# Altium PCB ESP32S3 Core.PcbDoc
Units mil, origin at the board's own origin, x right, y up, seen from the top; angles counter-clockwise.
Board outline 2500 x 1100 mil, 2 copper layers (Top Layer, Bottom Layer), stack 26.6 mil thick; 43 components, 58 nets, 243 pads, 87 vias.
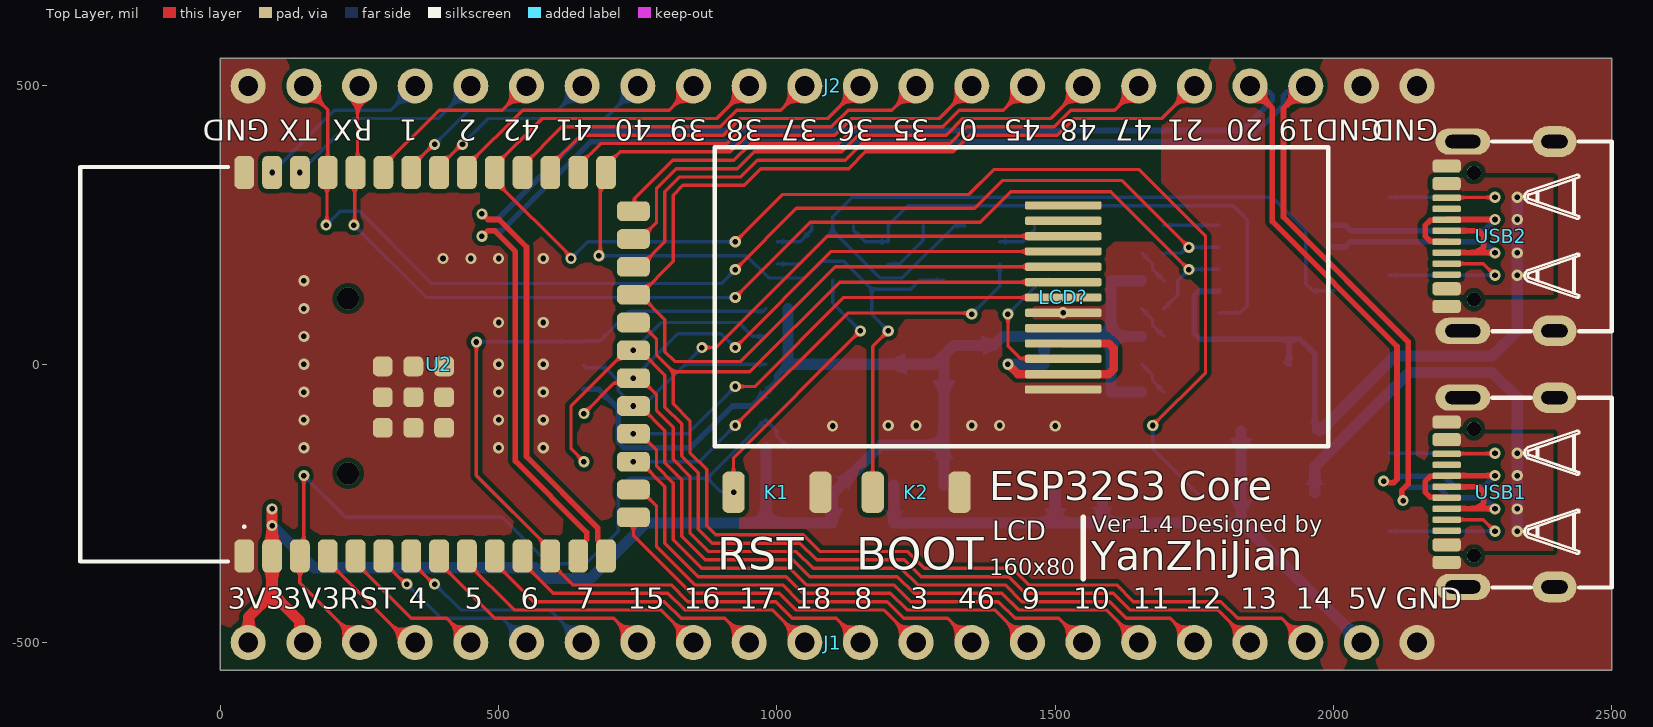
[diagram p0: Top Layer view]
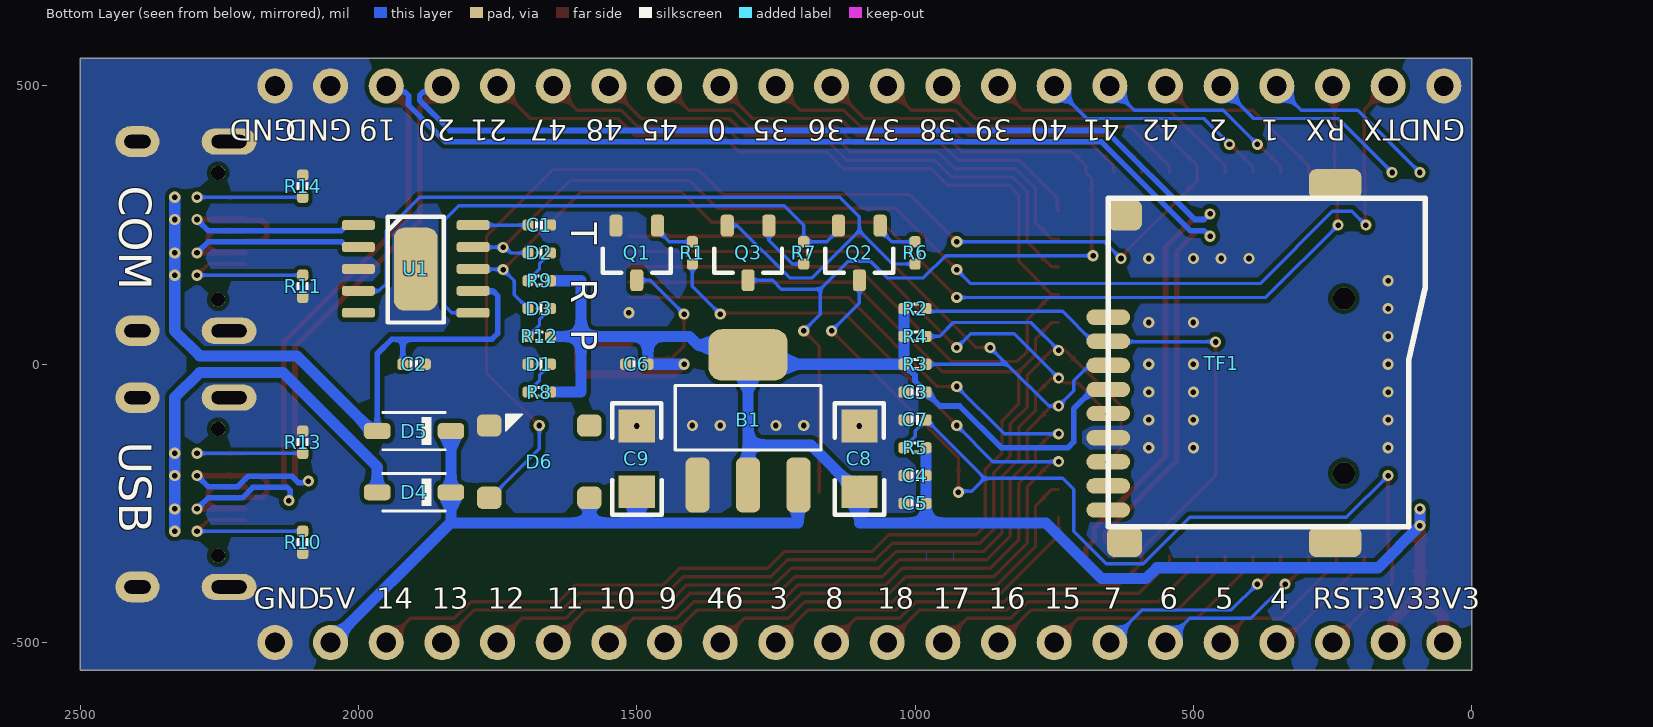
[diagram p1: Bottom Layer view, seen from below]
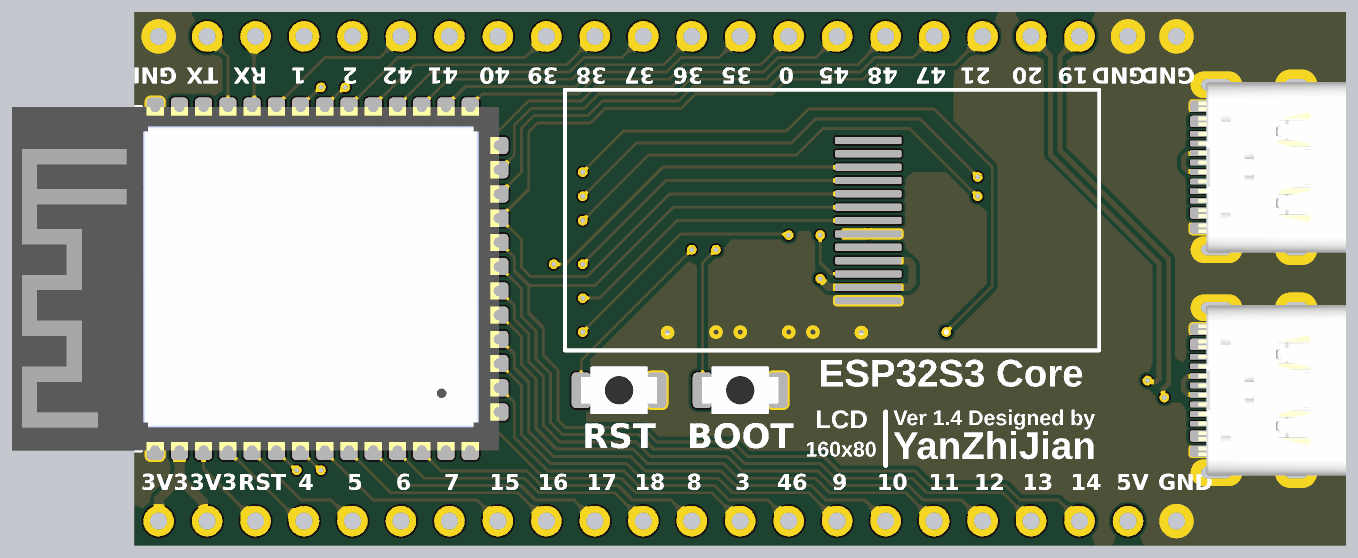
[diagram p2: 3D render of the assembled board from above, using the file's embedded part models]
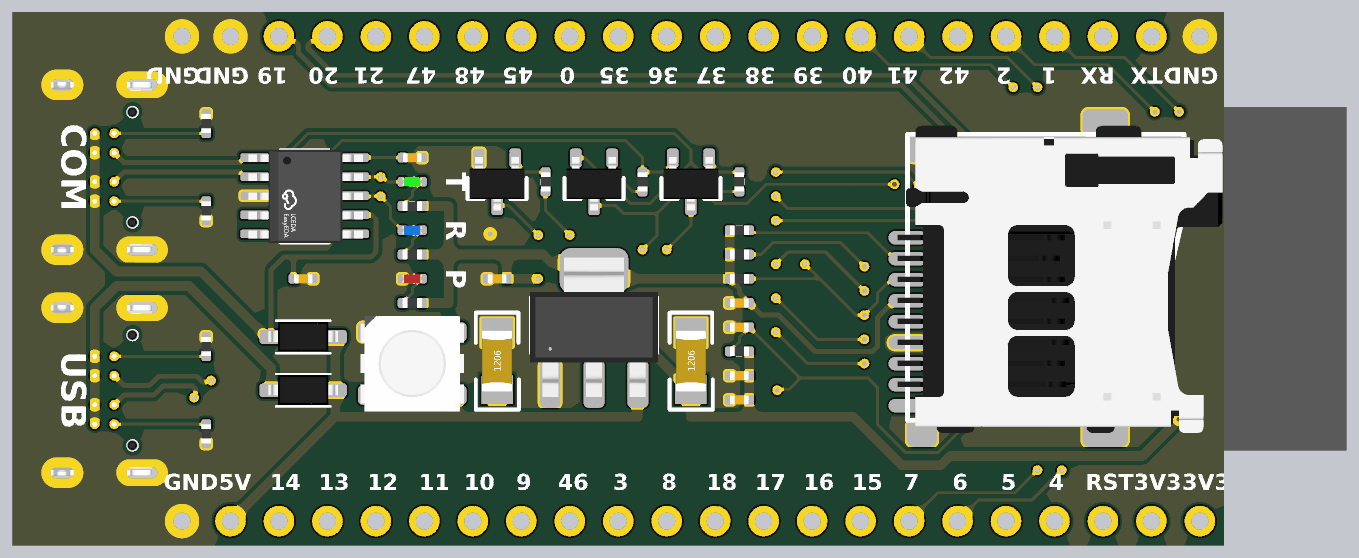
[diagram p3: 3D render of the assembled board from below, using the file's embedded part models]

## Layer stack, top to bottom
Top Solder: solder mask 0.4, Solder Resist, Dk 3.5
Top Layer: signal copper 1.4
Dielectric 4: prepreg 2.8, PP-006, Dk 4.1
Dielectric 2: prepreg 2.8, PP-006, Dk 4.1
Dielectric 1: dielectric 12.6, FR-4, Dk 4.8
Dielectric 3: prepreg 2.8, PP-006, Dk 4.1
Dielectric 5: prepreg 2.8, PP-006, Dk 4.1
Bottom Layer: signal copper 1.4
Bottom Solder: solder mask 0.4, Solder Resist, Dk 3.5

## Board outline
0,-550 0,550 2500,550 2500,-550

## Design rules (kind name [scope] priority, off if disabled: settings)
Clearance [All] p1: gap=8 ignorepadtopadclearanceinfootprint=TRUE
DiffPairsRouting [All] p1: maxlimit=10 minlimit=10 mostfreqgap=10 toplayer_minwidth=10 toplayer_maxwidth=10 toplayer_prefwidth=10 bottomlayer_minwidth=10 bottomlayer_maxwidth=10 bottomlayer_prefwidth=10 maxuncoupledlength=500
MatchedLengths [InDifferentialPairClass('90om')] p1: tolerance=1000 checknetsindiffpair=FALSE checkdiffpairvsdiffpair=TRUE checkxsignals=TRUE checkothers=TRUE
MatchedLengths DiffPair_90MatchedLengths [InDifferentialPairClass('90om')] p2: tolerance=5 checknetsindiffpair=TRUE checkdiffpairvsdiffpair=FALSE checkxsignals=FALSE checkothers=FALSE
MinimumSolderMaskSliver [All] p1: minsoldermaskwidth=0
PlaneConnect [All] p1: pad.planeconnectstyle=Relief pad.reliefexpansion=20 pad.reliefentries=4 pad.reliefconductorwidth=10 pad.reliefairgap=10 via.planeconnectstyle=Direct via.reliefexpansion=20 via.reliefentries=4 via.reliefconductorwidth=10 via.reliefairgap=10
PolygonConnect [All] p1: connectstyle=Direct reliefconductorwidth=10 reliefentries=4 polygonreliefangle="90 Angle" airgapwidth=10
RoutingVias [All] p1: holewidth=10 width=20 viastyle="Through Hole" minholewidth=10 minwidth=20 maxholewidth=50 maxwidth=50
SilkToSilkClearance [All] p1: silktosilkclearance=0
SilkToSolderMaskClearance [IsPad] p1: minsilkscreentomaskgap=0 clearancetoexposedcopper=TRUE
SolderMaskExpansion [All] p1: expansion=4 istentingtop=FALSE
SupplyNets "Schematic Supply Nets_4" [InNet('VBUS')] p1: voltage=0.000
SupplyNets "Schematic Supply Nets_3" [InNet('GND')] p2: voltage=0.000
SupplyNets "Schematic Supply Nets_2" [InNet('VCC_3V3')] p3: voltage=0.000
SupplyNets "Schematic Supply Nets" [InNet('VCC_5V')] p4: voltage=0.000
UnRoutedNet [All] p1: checkbadconnections=TRUE
Width [All] p1: maxlimit=20 minlimit=6 preferedwidth=6
24 further rules are at their usual default settings.

## Classes and differential pairs
differential pair COM: +D+ -D-
differential pair USB: +IO19 -IO20

## Components (designator, comment, footprint, x,y, rotation, side; value= is the part's Value field where it differs from the comment)
B1 "TLV1117-3.3" SOT-223 1300,-100 r270 bottom locked
C1 "0.1uF" CAP_0402 1675,250 r180 bottom locked value=0.1u
C2 "0.1uF" CAP_0402 1900,0 r180 bottom locked value=0.1u
C3 "0.1uF" CAP_0402 1000,-50 r180 bottom locked value=0.1u
C4 "10uF" CAP_0402 1000,-200 r180 bottom locked value=0.1u
C5 "0.1uF" CAP_0402 1000,-250 r180 bottom locked value=0.1u
C6 "0.1uF" CAP_0402 1500,0 r180 bottom locked value=0.1u
C7 "1uF" CAP_0402 1000,-100 r180 bottom locked value=0.1u
C8 "22uF" "C 1206" 1100,-170 r90 bottom locked value=0.1u
C9 "10uF" "C 1206" 1500,-170 r90 bottom locked value=0.1u
D1 "color?" LED_0402_RED 1675,0 r0 bottom locked
D2 "color?" LED_0402_GREEN 1675,200 r0 bottom locked
D3 "color?" LED_0402_BLUE 1675,100 r0 bottom locked
D4 "1N5819HW-7-F" SOD-123 1900,-230 r0 bottom locked
D5 "1N5819HW-7-F" SOD-123 1900,-120 r0 bottom locked
D6 "=value" LED_5050_WS2812B 1675,-175 r0 bottom locked
J1 "排针22p" 排针22P 50,-500 r0 top locked
J2 "排针22p" 排针22P 50,500 r0 top locked
K1 "TACT 2P" ButtonTACT_3x4x2_180 1000,-230 r180 top locked value=3x4
K2 "TACT 2P" ButtonTACT_3x4x2_180 1250,-230 r180 top locked value=3x4
LCD? "LCD" "LCD-80x160 0.96 13P" 1400,120 r0 top locked
Q1 "Value" SOT23_3 1500,200 r270 bottom locked
Q2 "Value" SOT23_3 1100,200 r270 bottom locked
Q3 "Value" SOT23_3 1300,200 r270 bottom locked
R1 "10K" RES_0402 1400,200 r90 bottom locked value=22R
R2 "10K" RES_0402 1000,100 r180 bottom locked value=22R
R3 "10K" RES_0402 1000,0 r180 bottom locked value=22R
R4 "10K" RES_0402 1000,50 r180 bottom locked value=22R
R5 "10K" RES_0402 1000,-150 r180 bottom locked value=22R
R6 "10K" RES_0402 1000,200 r90 bottom locked value=22R
R7 "10K" RES_0402 1200,200 r270 bottom locked value=22R
R8 "1K" RES_0402 1675,-50 r0 bottom locked value=22R
R9 "1K" RES_0402 1675,150 r0 bottom locked value=22R
R10 "5.1K" RES_0402 2100,-320 r270 bottom locked value=22R
R11 "5.1K" RES_0402 2100,140 r270 bottom locked value=22R
R12 "1K" RES_0402 1675,50 r0 bottom locked value=22R
R13 "5.1K" RES_0402 2100,-140 r270 bottom locked value=22R
R14 "5.1K" RES_0402 2100,320 r270 bottom locked value=22R
TF1 "TF" TF-SOCKET 325,265 r180 bottom locked
U1 "CH340K" ESSOP10 2000,250 r270 bottom locked
U2 "ESP32-S3-WROOM-1" ESP32S3WROOM1N16R8 250,0 r90 top locked
USB1 "Type-C" "USB TYPE-C 16P" 2300,-230 r90 top locked
USB2 "Type-C" "USB TYPE-C 16P" 2300,230 r90 top locked

## Footprints (in the part's own frame and the unit in brackets; to place one, negate y for a bottom-side part, rotate by r counter-clockwise, add the part's x,y. Pads: shape width x height; smd on the part's side, far side on the other; paste and mask are expansions set on the pad)
ButtonTACT_3x4x2_180 [mil]
  rrect50% 40x74 smd: 1(-78,0) 2(78,0)
  body extent -79,-49 79,49, height 63
"C 1206" [mm]
  rect 1.5x1.65 smd: 1(-1.5,0) 2(1.5,0)
  silkscreen extent -2.54,-1.14 2.54,1.12, body extent -1.6,-0.8 1.6,0.8, height 1.1
CAP_0402 [mil]
  rrect50% 20x20 smd: 1(-20,0) 2(20,0)
  silkscreen extent -7,-9 7,9, body extent -20,-10 20,10, height 20
ESP32S3WROOM1N16R8 [mm]
  rrect50% 1.5x0.9 smd: 1(-8.75,5.26) 2(-8.75,3.99) 3(-8.75,2.72) 4(-8.75,1.45) 5(-8.75,0.18) 6(-8.75,-1.09) 7(-8.75,-2.36) 8(-8.75,-3.63) 9(-8.75,-4.9) 10(-8.75,-6.17) 11(-8.75,-7.44) 12(-8.75,-8.71) 13(-8.75,-9.98) 14(-8.75,-11.25) 27(8.75,-11.25) 28(8.75,-9.98) 29(8.75,-8.71) 30(8.75,-7.44) 31(8.75,-6.17) 32(8.75,-4.9) 33(8.75,-3.63) 34(8.75,-2.36) 35(8.75,-1.09) 36(8.75,0.18) 37(8.75,1.45) 38(8.75,2.72) 39(8.75,3.99) 40(8.75,5.26)
  rrect50% 0.9x1.5 smd: 15(-6.985,-12.5) 16(-5.715,-12.5) 17(-4.445,-12.5) 18(-3.175,-12.5) 19(-1.905,-12.5) 20(-0.635,-12.5) 21(0.635,-12.5) 22(1.905,-12.5) 23(3.175,-12.5) 24(4.445,-12.5) 25(5.715,-12.5) 26(6.985,-12.5)
  rrect50% 0.9x0.9 smd: 41(-2.9,-2.46) 41(-2.9,-1.06) 41(-2.9,-3.86) 41(-1.5,-1.06) 41(-1.5,-3.86) 41(-1.5,-2.46) 41(-0.1,-1.06) 41(-0.1,-2.46) 41(-0.1,-3.86)
  silkscreen extent -9,5.21 9,12.75, body extent -9,-12.75 9,12.75, height 3.25
ESSOP10 [mm]
  rrect50% 3.8x2 smd: 0(2.007,2.616)
  rrect50% 0.45x1.5 smd: 1(0,0) 2(1,0) 3(2,0) 4(3,0) 5(4,0) 6(4,5.232) 7(3,5.232) 8(2,5.232) 9(1,5.232) 10(0,5.232)
  silkscreen extent -0.38,1.35 4.45,3.89, body extent -0.42,-0.33 4.48,5.67, height 1.66
"LCD-80x160 0.96 13P" [mm]
  rrect50% 3.5x0.38 smd: 1(2.9,4.2) 2(2.9,3.5) 3(2.9,2.8) 4(2.9,2.1) 5(2.9,1.4) 6(2.9,0.7) 7(2.9,0) 8(2.9,-0.7) 9(2.9,-1.4) 10(2.9,-2.1) 11(2.9,-2.8) 12(2.9,-3.5) 13(2.9,-4.2)
  silkscreen extent -13,-6.8 15,6.86, body extent -12.9,-6.71 14.99,6.81, height 1.5
LED_0402_BLUE [mil]
  rrect50% 20x20 smd: 1(-20,0) 2(20,0)
  silkscreen extent -6,-10 6,10, body extent -20,-10 20,10, height 18
LED_0402_GREEN [mil]
  rrect50% 20x20 smd: 1(-20,0) 2(20,0)
  silkscreen extent -6,-10 6,10, body extent -20,-10 20,10, height 18
LED_0402_RED [mil]
  rrect50% 20x20 smd: 1(-20,0) 2(20,0)
  silkscreen extent -6,-10 6,10, body extent -20,-10 20,10, height 18
LED_5050_WS2812B [mil]
  rrect50% 44x40 smd: 1(-90,65) 2(-90,-65) 3(90,-65) 4(90,65)
  silkscreen extent 30,-85 60,-55, body extent -106,-98 106,98, height 69
RES_0402 [mil]
  rrect50% 20x20 smd: 1(-20,0) 2(20,0)
  silkscreen extent -7,-10 7,10, body extent -20,-10 20,10, height 14
SOD-123 [mm]
  rrect50% 1.21x0.73 smd: A(1.68,0) C(-1.68,0)
  silkscreen extent -1.43,-0.85 1.43,0.85, body extent -1.83,-0.79 1.83,0.76, height 1.1
SOT23_3 [mm] "SOT23, 3-Leads, Body 3.1x3.0mm (max), Pitch 0.95mm, IPC Medium Density"
  rrect50% 1x0.6 smd: 1(-1.246,0.95) 2(-1.246,-0.95) 3(1.246,0)
  silkscreen extent -0.2,-1.55 0.9,1.55, body extent -1.3,-1.45 1.5,1.45, height 1.2
SOT-223 [mm]
  rrect50% 2.5x1.1 smd: 1(2.97,-2.3) 2(2.97,0) 3(2.97,2.3)
  rrect50% 2.34x3.6 smd: 4(-2.97,0)
  silkscreen extent -1.57,-3.33 1.37,3.33, body extent -3.64,-3.35 3.64,3.35, height 1.81
TF-SOCKET [mm]
  oval 2x0.7 smd: 1(-8.331,-4.582) 2(-8.331,-5.682) 3(-8.331,-6.782) 4(-8.331,-7.882) 5(-8.331,-8.982) 6(-8.331,-10.082) 7(-8.331,-11.182) 8(-8.331,-12.282) 9(-8.331,-13.382)
  rrect50% 1.6x1.4 smd: 10(-7.577,-14.836) 10(-7.577,0.068)
  rrect50% 2.4x1.4 smd: 10(2.023,-14.836) 10(2.023,1.476)
  silkscreen extent -8.33,-14.15 6.15,0.84, body extent -8.87,-14.81 8.18,1.29, height 2.05
"USB TYPE-C 16P" [mm]
  oval 1.2x2.5 hole 0.6 slot 1.6 at 90 deg: 1(-4.32,1.718) 3(4.32,1.717)
  oval 1.4x2 hole 0.6 slot 1.2 at 90 deg: 2(-4.32,-2.462) 4(4.32,-2.462)
  rrect50% 0.3x1.3 smd mask+0.064: A5(-1.25,2.462) A6(-0.25,2.462) A7(0.25,2.462) A8(1.25,2.462) B5(1.75,2.462) B6(0.75,2.462) B7(-0.75,2.462) B8(-1.75,2.462)
  rrect50% 0.6x1.3 smd mask+0.064: GND1(-3.2,2.462) GND2(3.2,2.462) VBUS1(-2.4,2.462) VBUS2(2.4,2.462)
  round 0.65 hole 0.65 unplated mask+0: ""(-2.89,1.218) ""(2.89,1.218)
  silkscreen extent -4.34,-5.07 4.32,0.37, body extent -4.48,-5.08 4.48,2.67, height 3.26
排针22P [mm]
  round 1.6 hole 0.9: 1(0,0) 2(2.54,0) 3(5.08,0) 4(7.62,0) 5(10.16,0) 6(12.7,0) 7(15.24,0) 8(17.78,0) 9(20.32,0) 10(22.86,0) 11(25.4,0) 12(27.94,0) 13(30.48,0) 14(33.02,0) 15(35.56,0) 16(38.1,0) 17(40.64,0) 18(43.18,0) 19(45.72,0) 20(48.26,0) 21(50.8,0) 22(53.34,0)

## Part data
B1: library part CJT1117-3.3, "LDO", Manufacturer_Name="Advanced Monolithic Systems", Manufacturer_Part_Number=AMS1117-3.3, Datasheet Link=http://www.advanced-monolithic.com/pdf/ds1117.pdf, Geometry.Height=1.8mm
C1 C2 C3 C4 C5 C6 C7: library part 电容-0402, "Capacitor"
C8 C9: library part 电容-1206, "Capacitor"
D1 D2 D3: library part LED_0402, "LED", Type=0402
D4 D5: "Diode Schottky 40 V 1A Surface Mount SOD-123", Package="SOD-123 Fairchild Semiconductor", Availability="In Stock", Check_prices=https://www.snapeda.com/parts/1N5819HW-7-F/Diodes+Inc./view-part/?ref=eda, MF="Diodes Inc.", MP=1N5819HW-7-F, Price=None, Purchase-URL=https://pricing.snapeda.com/search/part/1N5819HW-7-F/?ref=eda, SnapEDA_Link=https://www.snapeda.com/parts/1N5819HW-7-F/Diodes+Inc./view-part/?ref=snap
D6: library part LED_5050_WS2812B, "LED"
K1 K2: library part ButtonTACT_3x4x2_180, "Button", Type="TACT 2P"
LCD?: library part "LCD-80x160 0.96", "0.96 LCD 80*160", BOM名称="12864 点阵屏", Parameter=显示器件, 学习资源=www.openedv.com, 版权归属=正点原子
Q1 Q2 Q3: library part BJT_NPN, "Triode_NPN_SMD"
R1 R2 R3 R4 R5 R6 R7 R8 R9 R10 R11 R12 R13 R14: library part 电阻-0402, "Resistor"
TF1: library part TF卡座
U1: "USB to TTL Serial / UART for dual power"
USB1 USB2: library part "USB-Type-C 16P", "USB-Type-C_16P"

## Via types
v1: diameter 20, hole 10, Top Layer to Bottom Layer, 85 vias
v2: diameter 39.37, hole 39.37, Top Layer to Bottom Layer, 2 vias

## Nets (pads, with @x,y where several pads share a name; then routed paths per layer and width w, separated by ;. In a path a pad name is that pad's centre, name@x,y a point inside that pad or via, vN(x,y) a via of type N, cw(c..) or ccw(c..) an arc to the next point about the centre after c; other vN are vias at no path point)
D+: U1.1 USB2.A6 USB2.B6 | length 494.3
  Top Layer w10: USB2.A6 2202.27,220.94 2173.81,220.94 2164.46,230.28 2164.46,249.4 2173.81,258.75 2202.27,258.75 2203.52,260 v1(2290,260)
  Bottom Layer w10: U1.1 2020.67,250 2030.67,240 2270,240 v1(2290,260)
D-: U1.2 USB2.A7 USB2.B7 | length 494.1
  Top Layer w10: USB2.B7 2259.53,200.47 ; USB2.A7 2260.16,239.84 2269.84,230.16 2269.84,210.78 2259.53,200.47 ; v1(2290,200) 2289.53,200.47 2259.53,200.47
  Bottom Layer w10: U1.2 2020.67,210.63 2030.04,220 2270,220 v1(2290,200)
DTR: Q3.2 R6.1 U1.4 | length 1501.2
  Bottom Layer w6: R6.1 1040,180 1100,240 ; Q3.2 1319.06,249.06 1225,155 1185,155 1100,240 ; U1.4 1963.11,131.89 1950,145 1950,240 1890,300 1135,300 1100,265 1100,240
EN: C7.2 J1.3 K1.2 Q2.3 R5.1 U2.3 | length 2014.1
  Top Layer w6: v1(150,-200) 150,-337.4 U2.3 142.91,-392.91 J1.3 ; v1(922,-230) 922,-168 v1(1150,60)
  Bottom Layer w6: v1(150,-200) 225,-275 506.11,-275 589.76,-358.65 656.35,-358.65 715,-300 715,-225 735,-205 875,-205 ; v1(922,-230) 920,-228 898,-228 875,-205 ; R5.1 999.73,-129.73 999.73,-119.73 C7.2 875,-205 ; Q2.3 1100,110 v1(1150,60)
GND: B1.1 C1.2 C2.2 C3.1 C4.1 C5.1 C6.1 C7.1 C8.2 C9.2 D1.2 D6.3 J1.22 J2.1 J2.21 J2.22 K1.1 K2.1 LCD?.8 LCD?.13 Q1.2 R10.2 R11.2 R13.1 R14.1 TF1.6 TF1.10 U1.0 U1.3 U2.1 U2.40 U2.41 USB1.1 USB1.2 USB1.3 USB1.4 USB1.GND1 USB1.GND2 USB2.1 USB2.2 USB2.3 USB2.4 USB2.GND1 USB2.GND2
  other v1: 150,-150 500,-150 580,-150 1100,-110.94 1500,-110.94 1200,-110 1250,-110 1350,-110 1400,-110 150,-100 500,-100 580,-100 150,-50 500,-50 580,-50 150,0 500,0 580,0 150,50 500,75 580,75 1514.17,92.44 150,100 150,150 400,190 450,190 500,190 580,190
IO0: J2.14 K2.2 Q3.3 U2.27 | length 1948.6
  Top Layer w6: v1(680,195) 682.68,197.68 682.68,334.25 U2.27 692.91,356.3 718.12,381.5 916.36,381.5 946.36,411.5 1103.93,411.5 1133.93,441.5 1291.5,441.5 J2.14 ; K2.2 1172,32 v1(1200,60)
  Bottom Layer w6: v1(680,195) 945,195 985,155 1050,155 1080,185 1120,185 1170,135 ; v1(1200,60) 1170,90 1170,135 ; Q3.3 1255.94,150.94 1240,135 1170,135
IO1: J2.4 U2.39 | length 321.5
  Bottom Layer w6: v1(92.91,344.49) 204.93,456.5 306.5,456.5 J2.4
IO2: J2.5 U2.38 | length 371.5
  Bottom Layer w6: v1(142.91,344.49) 239.93,441.5 391.5,441.5 J2.5
IO3: J1.13 U2.15 | length 620
  Top Layer w6: U2.15 742.13,-307.27 846.36,-411.5 1003.93,-411.5 1033.93,-441.5 1191.5,-441.5 J1.13
IO4: J1.4 U2.4 | length 226.8
  Top Layer w6: U2.4 192.91,-353.51 339.4,-500 J1.4
IO5: J1.5 U2.5 | length 278.4
  Top Layer w6: U2.5 242.91,-356.3 343.12,-456.5 406.5,-456.5 J1.5
IO6: J1.6 U2.6 | length 327.4
  Top Layer w6: U2.6 292.91,-354.61 333.31,-395 v1(335,-395)
  Bottom Layer w6: v1(335,-395) 396.5,-456.5 506.5,-456.5 J1.6
IO7: J1.7 U2.7 | length 377.4
  Top Layer w6: U2.7 342.91,-354.61 383.31,-395 v1(385,-395)
  Bottom Layer w6: v1(385,-395) 431.5,-441.5 591.5,-441.5 J1.7
IO8: J1.12 R2.2 TF1.2 U2.12 | length 1612.8
  Top Layer w6: v1(460,40) 460,-199.88 592.91,-332.8 U2.12 592.91,-356.3 633.12,-396.5 810.14,-396.5 840.14,-426.5 997.72,-426.5 1027.72,-456.5 1106.5,-456.5 J1.12
  Bottom Layer w6: v1(460,40) 460.65,40.65 652.35,40.65 TF1.2 681.31,41.31 735,95 975,95 R2.2
IO9: J1.15 R1.1 U2.17 | length 1732.1
  Top Layer w6: v1(742.13,-175) 753.94,-175 798.65,-219.72 798.65,-321.37 858.78,-381.5 1016.36,-381.5 1046.36,-411.5 1203.93,-411.5 1233.93,-441.5 1391.5,-441.5 J1.15 ; v1(925,-110) 1127,92 1348,92 v1(1350,90)
  Bottom Layer w6: v1(742.13,-175) 860,-175 v1(925,-110) ; v1(1350,90) 1400,140 R1.1
IO10: J1.16 LCD?.7 U2.18 | length 1913.1
  Top Layer w6: v1(742.13,-125) 753.94,-125 783.65,-154.72 783.65,-183.5 813.65,-213.5 813.65,-315.16 865,-366.5 1022.57,-366.5 1052.57,-396.5 1210.14,-396.5 1240.14,-426.5 1397.72,-426.5 1427.72,-456.5 1506.5,-456.5 J1.16 ; v1(925,-40) 960,-40 1120,120 LCD?.7
  Bottom Layer w6: v1(742.13,-125) 840,-125 v1(925,-40)
IO11: J1.17 LCD?.3 R3.2 TF1.3 U2.19 | length 2350.5
  Top Layer w6: v1(742.13,-75) 753.94,-75 798.65,-119.72 798.65,-177.29 828.65,-207.29 828.65,-308.95 871.21,-351.5 1028.78,-351.5 1058.78,-381.5 1216.36,-381.5 1246.36,-411.5 1403.93,-411.5 1433.93,-441.5 1591.5,-441.5 J1.17 ; v1(865,30) 890,30 1090.24,230.24 LCD?.3
  Bottom Layer w6: TF1.3 657.13,-6.13 691.13,-6.13 715,-30 715,-47.87 v1(742.13,-75) 760,-75 835,0 ; v1(865,30) 835,0 ; R3.2 835,0
IO12: J1.18 LCD?.4 TF1.5 U2.20 | length 2317.3
  Top Layer w6: v1(653,-88.61) 707.98,-33.64 733.49,-33.64 v1(742.13,-25) 753.94,-25 783.65,-54.72 783.65,-83.5 813.65,-113.5 813.65,-171.08 843.65,-201.08 843.65,-302.73 877.42,-336.5 1035,-336.5 1065,-366.5 1222.57,-366.5 1252.57,-396.5 1410.14,-396.5 1440.14,-426.5 1597.72,-426.5 1627.72,-456.5 1706.5,-456.5 J1.18 ; v1(925,30) 1097.68,202.68 LCD?.4
  Bottom Layer w6: v1(742.13,-25) 822.13,55 900,55 v1(925,30)
IO13: J1.19 R4.2 TF1.7 U2.21 | length 1984.6
  Top Layer w6: v1(653,-175.23) 630,-152.23 630,-75 730,25 v1(742.13,25) 753.94,25 798.65,-19.72 798.65,-77.29 828.65,-107.29 828.65,-164.86 858.65,-194.86 858.65,-296.52 883.64,-321.5 1041.21,-321.5 1071.21,-351.5 1228.78,-351.5 1258.78,-381.5 1416.36,-381.5 1446.36,-411.5 1603.93,-411.5 1633.93,-441.5 1791.5,-441.5 J1.19
  Bottom Layer w6: v1(742.13,25) 792.13,75 931,75 956,50 R4.2
IO14: J1.20 LCD?.6 U2.22 | length 2357.1
  Top Layer w6: U2.22 753.94,75 783.65,45.28 783.65,16.5 813.65,-13.5 ; LCD?.6 1112.56,147.56 951.5,-13.5 813.65,-13.5 ; J1.20 1906.5,-456.5 1827.72,-456.5 1797.72,-426.5 1640.14,-426.5 1610.14,-396.5 1452.57,-396.5 1422.57,-366.5 1265,-366.5 1235,-336.5 1077.42,-336.5 1047.42,-306.5 889.85,-306.5 873.65,-290.31 873.65,-188.65 843.65,-158.65 843.65,-101.08 813.65,-71.08 813.65,-13.5
IO15: J1.8 U2.8 | length 428.4
  Top Layer w6: U2.8 392.91,-356.3 493.12,-456.5 706.5,-456.5 J1.8
IO16: J1.9 U2.9 | length 478.4
  Top Layer w6: U2.9 442.91,-356.3 528.12,-441.5 791.5,-441.5 J1.9
IO17: J1.10 U2.10 | length 528.4
  Top Layer w6: U2.10 492.91,-356.3 563.12,-426.5 797.72,-426.5 827.72,-456.5 906.5,-456.5 J1.10
IO18: J1.11 U2.11 | length 578.4
  Top Layer w6: U2.11 542.91,-356.3 598.12,-411.5 803.93,-411.5 833.93,-441.5 991.5,-441.5 J1.11
IO19: J2.20 U2.13 USB1.A7 USB1.B7 | length 3545.2
  Top Layer w10: v1(470,230) 470.86,230 480.86,240 492.53,240 530,202.53 530,-174.05 657.91,-301.96 657.91,-315.59 642.91,-330.59 U2.13 ; J2.20 1910,460 1910,264.39 2133.96,40.43 2133.96,-215.18 2122.25,-226.89 2122.25,-235.18 2123.09,-236.02 2123.09,-243.09 v1(2125,-245) ; USB1.B7 2259.53,-259.53 ; USB1.A7 2260.16,-220.16 2269.84,-229.84 2269.84,-249.22 2259.53,-259.53 ; v1(2290,-260) 2289.53,-259.53 2259.53,-259.53
  Bottom Layer w10: v1(470,230) 470.86,230 480.86,240 505.78,240 665.78,400 1844.04,400 1910,465.96 1910,482.53 1917.33,489.86 1939.86,489.86 J2.20 ; v1(2125,-245) 2123.09,-243.09 2123.09,-236.02 2122.25,-235.18 2122.25,-226.89 2128.11,-221.04 2189.57,-221.04 2208.54,-240 2270,-240 v1(2290,-260)
IO20: J2.19 U2.14 USB1.A6 USB1.B6 | length 3545.1
  Top Layer w10: v1(470,270) 470.86,270 480.86,260 500.81,260 550,210.81 550,-165.76 677.91,-293.68 677.91,-315.59 692.91,-330.59 U2.14 ; J2.19 1890,460 1890,256.11 2113.96,32.14 2113.96,-206.89 2108.11,-212.75 2099.82,-212.75 2098.98,-211.91 2091.91,-211.91 v1(2090,-210) ; USB1.A6 2202.27,-239.06 2173.81,-239.06 2164.46,-229.72 2164.46,-210.6 2173.81,-201.25 2202.27,-201.25 2203.52,-200 v1(2290,-200)
  Bottom Layer w10: v1(470,270) 470.86,270 480.86,260 497.5,260 657.5,420 1835.76,420 1890,474.24 1890,482.53 1882.67,489.86 1860.14,489.86 J2.19 ; v1(2090,-210) 2091.91,-211.91 2098.98,-211.91 2099.82,-212.75 2108.11,-212.75 2119.82,-201.04 2197.86,-201.04 2216.82,-220 2270,-220 v1(2290,-200)
IO21: J2.18 LCD?.5 U2.23 | length 2147.2
  Top Layer w6: U2.23 U2.23@753.94,125 ; LCD?.5 1105.12,175.12 935,5 816.36,5 798.65,22.71 798.65,80.28 U2.23@753.94,125 ; J2.18 1691.5,441.5 1533.93,441.5 1503.93,411.5 1346.36,411.5 1316.36,381.5 1158.78,381.5 1128.78,351.5 971.21,351.5 941.21,321.5 831.14,321.5 813.65,304.01 813.65,184.72 U2.23@753.94,125
IO35: J2.13 U2.28 | length 678.4
  Top Layer w6: U2.28 642.91,356.3 683.12,396.5 910.14,396.5 940.14,426.5 1097.72,426.5 1127.72,456.5 1206.5,456.5 J2.13
IO36: J2.12 U2.29 | length 628.4
  Top Layer w6: U2.29 592.91,356.3 648.12,411.5 903.93,411.5 933.93,441.5 1091.5,441.5 J2.12
IO37: J2.11 U2.30 | length 578.2
  Top Layer w6: U2.30 542.91,355.91 613.5,426.5 897.72,426.5 927.72,456.5 1006.5,456.5 J2.11
IO38: D6.4 J2.10 U2.31 | length 2543.5
  Top Layer w6: v1(630,190) 630,192.8 492.91,329.88 U2.31 492.91,356.3 578.12,441.5 891.5,441.5 J2.10 ; v1(925,220) 1010,305 1345,305 1390,350 1650,350 1770,230 1770,-15 v1(1675,-110)
  Bottom Layer w6: v1(630,190) 660,220 v1(925,220) ; v1(1675,-110) 1675,-152 1763,-240 D6.4
IO39: J2.9 U2.32 | length 478.4
  Top Layer w6: U2.32 442.91,356.3 543.12,456.5 806.5,456.5 J2.9
IO40: J2.8 U2.33 | length 427.4
  Top Layer w6: U2.33 392.91,354.61 433.31,395 v1(435,395)
  Bottom Layer w6: v1(435,395) 481.5,441.5 691.5,441.5 J2.8
IO41: J2.7 U2.34 | length 377.4
  Top Layer w6: U2.34 342.91,354.61 383.31,395 v1(385,395)
  Bottom Layer w6: v1(385,395) 446.5,456.5 606.5,456.5 J2.7
IO42: J2.6 U2.35 | length 328.4
  Top Layer w6: U2.35 292.91,356.3 393.12,456.5 506.5,456.5 J2.6
IO45: J2.15 U2.26 | length 813.4
  Top Layer w6: U2.26 744.2,277.08 744.2,298.2 812.5,366.5 922.57,366.5 952.57,396.5 1110.14,396.5 1140.14,426.5 1297.72,426.5 1327.72,456.5 1406.5,456.5 J2.15
IO46: J1.14 U2.16 | length 764.5
  Top Layer w6: U2.16 753.94,-225 783.65,-254.72 783.65,-327.59 852.57,-396.5 1010.14,-396.5 1040.14,-426.5 1197.72,-426.5 1227.72,-456.5 1306.5,-456.5 J1.14
IO47: J2.17 U2.24 | length 1095.5
  Top Layer w6: U2.24 753.94,175 798.65,219.72 798.65,310.23 824.93,336.5 935,336.5 965,366.5 1122.57,366.5 1152.57,396.5 1310.14,396.5 1340.14,426.5 1497.72,426.5 1527.72,456.5 1606.5,456.5 J2.17
IO48: J2.16 U2.25 | length 957.9
  Top Layer w6: U2.25 753.94,225 783.65,254.72 783.65,316.44 818.72,351.5 928.78,351.5 958.78,381.5 1116.36,381.5 1146.36,411.5 1303.93,411.5 1333.93,441.5 1491.5,441.5 J2.16
LCD_LEDK: LCD?.11 Q1.3 | length 276
  Top Layer w6: v1(1415,90) 1415,33 1437.79,10.21 1513.73,10.21 LCD?.11
  Bottom Layer w6: v1(1415,90) 1475.94,150.94 Q1.3
NetC1_1: C1.1 U1.10 | length 99
  Bottom Layer w6: C1.1 U1.10
NetD1_1: D1.1 R8.2 | length 66.6
  Bottom Layer w6: D1.1 1674.73,-19.73 1674.73,-29.73 R8.2
NetD2_1: D2.1 R9.2 | length 66.6
  Bottom Layer w6: D2.1 1674.73,180.27 1674.73,170.27 R9.2
NetD3_1: D3.1 R12.2 | length 66.6
  Bottom Layer w6: D3.1 1674.73,80.27 1674.73,70.27 R12.2
NetQ1_1: Q1.1 R1.2 | length 79.2
  Bottom Layer w6: R1.2 1441.42,220 1462.6,241.18 Q1.1
NetQ2_1: Q2.1 R6.2 | length 79.2
  Bottom Layer w6: R6.2 1041.42,220 1062.6,241.18 Q2.1
NetQ3_1: Q3.1 R7.2 | length 106.7
  Bottom Layer w6: R7.2 1220,180 1262.6,222.6 Q3.1
NetR10_1: R10.1 USB1.A5 | length 285.6
  Top Layer w6: USB1.A5 2269.21,-279.21 v1(2290,-300)
  Bottom Layer w6: R10.1 v1(2290,-300)
NetR11_1: R11.1 USB2.A5 | length 285.6
  Top Layer w6: USB2.A5 2269.21,180.79 v1(2290,160)
  Bottom Layer w6: R11.1 v1(2290,160)
NetR13_2: R13.2 USB1.B5 | length 277.4
  Top Layer w6: USB1.B5 2203.6,-160.55 2289.45,-160.55 v1(2290,-160)
  Bottom Layer w6: R13.2 v1(2290,-160)
NetR14_2: R14.2 USB2.B5 | length 277.4
  Top Layer w6: USB2.B5 2203.6,299.45 2289.45,299.45 v1(2290,300)
  Bottom Layer w6: R14.2 v1(2290,300)
RTS: Q2.2 R7.1 U1.6 | length 990.3
  Bottom Layer w6: Q2.2 1137.4,241.18 1158.58,220 R7.1 1200,250 1235,285 1820,285 1845,260 1845,105 1832.52,92.52 U1.6
RXD: D2.2 J2.2 U1.9 U2.37 | length 2112.9
  Top Layer w6: J2.2 192.91,457.09 U2.37 191.46,343.03 191.46,251.46 v1(190,250) ; v1(925,170) 1035,280 1355,280 1405,330 1620,330 v1(1740,210)
  Bottom Layer w6: v1(190,250) 215,275 250,275 380,145 900,145 v1(925,170) ; D2.2 1726.21,200 1736.21,210 v1(1740,210) 1740.31,210.31 1793.68,210.31 U1.9
RXD0: D3.2 J2.3 U1.8 U2.36 | length 2087.8
  Top Layer w6: v1(240,250) 241.46,251.46 241.46,343.03 U2.36 246.46,348.03 246.46,496.46 J2.3 ; v1(925,120) 1060,255 1365,255 1420,310 1600,310 v1(1740,170)
  Bottom Layer w6: v1(240,250) 370,120 v1(925,120) ; D3.2 1720,125 1720,150 v1(1740,170) 1740.63,170.63 1793.37,170.63 U1.8
VBUS: C2.1 D5.A U1.7 USB2.VBUS1 USB2.VBUS2 | length 1205.1
  Bottom Layer w10: U1.7 1793.25,131.14 1757.75,131.14 1750,123.39 1750,55 1760,45 1920,45 ; C2.1@1915.31,3.69 C2.1@1919,0 ; C2.1 1920,45 ; D5.A 1966.14,18.86 1940,45 1920,45
  Bottom Layer w20: D5.A@1975.59,-120 2110.59,15 2285,15 2330,60 v1(2330,160) v1(2330,200) v1(2330,260) v1(2330,300)
VBUSB: D4.A USB1.VBUS1 USB1.VBUS2 | length 738.2
  Bottom Layer w20: D4.A 1966.14,-184.45 2135.59,-15 2285,-15 2330,-60 v1(2330,-160) v1(2330,-200) v1(2330,-260) v1(2330,-300)
VCC_3V3: B1.2 B1.4 C3.2 C4.2 C5.2 C6.2 C8.1 J1.1 J1.2 LCD?.10 LCD?.12 R2.1 R3.1 R4.1 R5.2 R8.1 R9.1 R12.1 TF1.4 U2.2 | length 4174
  Top Layer w15: v1(1415,0) 1432.78,-17.78 LCD?.12 1596.21,-17.8 1605,-9.01 1605,28.54 1596.21,37.32 LCD?.10
  Top Layer w20: J1.1 50.98,-499.02 50.98,-454.02 92.91,-412.09 ; v1(92.91,-260) v1(92.91,-290) U2.2 92.91,-412.09 ; J1.2 141.93,-491.93 141.93,-461.1 92.91,-412.09
  Bottom Layer w10: TF1.4 680.31,-45.31 715,-80 715,-140 725,-150 845,-150 920,-75 955,-75 C3.2 1000,-30 1000,-20 R3.1
  Bottom Layer w20: v1(92.91,-260) v1(92.91,-290) 168.56,-365.65 565.65,-365.65 585,-385 665,-385 765,-285 980,-285 ; R5.2 C4.2 C5.2 980,-285 ; R2.1 R4.1 R3.1 1283.07,0 B1.4 ; B1.2 1300,-145 ; v1(1415,0) C6.2 1480,50 ; R8.1 1600,-50 1600,50 ; R12.1 1600,50 ; R9.1 1600,150 1600,50 ; 980,-285 1100,-285 C8.1 1102.95,-229.05 1187.01,-145 1300,-145 ; 1300,-145 B1.4 ; B1.4 1316.97,33.9 1388.9,33.9 1405,50 1480,50 ; 1480,50 1600,50
VCC_5V: B1.3 C9.1 D4.C D5.C D6.1 J1.21 | length 1263.8
  Bottom Layer w20: B1.3 1210,-217.48 1210,-285 1500,-285 ; C9.1 1500,-285 ; D6.1 1585,-285 ; D5.C D4.C 1833.86,-283.86 J1.21 ; 1835,-285 1585,-285 ; 1500,-285 1585,-285
pads on no net: D6.2 LCD?.1 LCD?.2 LCD?.9 TF1.1 TF1.8 TF1.9 U1.5 USB1. USB1.A8 USB1.B8 USB2. USB2.A8 USB2.B8
copper on no net:
  other v2: 229.61,-196.09 229.61,118.08

## Polygon pours and split planes (outlines as drawn)
GND on Top Layer "GND_L01_P002" (solid, remove dead copper, pour order 2): 0,-550 0,550 2500,550 2500,-550
VBUSB on Top Layer "VBUSB_L01_P001" (solid, remove dead copper, pour order 1): 2180,-335 2180,-125 2395,-125 2395,-335
VBUS on Top Layer "VBUS_L01_P000" (solid, remove dead copper, pour order 0): 2180,125 2180,335 2395,335 2395,125
GND on Bottom Layer "GND_L02_P003" (solid, remove dead copper, pour order 3): 0,-550 0,550 2500,550 2500,-550

## Other copper
Top Layer:
  pour cut-out: 1690,430 1690,220 925,220 925,30 780,30 780,430

## Silkscreen, mask and mechanical layers (free items; w line width, h text height)
Top Overlay:
  lines w10: 1550,-385 1550,-275
  text "GND" at 88.13,451.92 h65 r180
  text "TX" at 173.05,451.92 h65 r180
  text "RX" at 274.13,451.92 h65 r180
  text "1" at 354.46,451.92 h65 r180
  text "2" at 460.64,451.92 h65 r180
  text "42" at 574.15,451.92 h65 r180
  text "41" at 667.81,451.92 h65 r180
  text "40" at 774.6,451.92 h65 r180
  text "39" at 873.75,451.92 h65 r180
  text "38" at 974.02,451.92 h65 r180
  text "37" at 1073.52,451.92 h65 r180
  text "36" at 1173.79,451.92 h65 r180
  text "35" at 1273.63,451.92 h65 r180
  text "0" at 1360.73,451.92 h65 r180
  text "45" at 1474.31,451.92 h65 r180
  text "48" at 1574.69,451.92 h65 r180
  text "47" at 1674.2,451.92 h65 r180
  text "21" at 1766.96,451.92 h65 r180
  text "20" at 1873.75,451.92 h65 r180
  text "19" at 1967.81,451.92 h65 r180
  text "GND" at 2088.13,451.92 h65 r180
  text "GND" at 2188.13,451.92 h65 r180
  text "ESP32S3 Core" at 1381,-262.5 h90
  text "Ver 1.4 Designed by" at 1565.83,-311.36 h50
  text "LCD" at 1387,-327.51 h60
  text "YanZhiJian" at 1564.81,-388.31 h90
  text "RST" at 892.47,-388.71 h100
  text "BOOT" at 1142.47,-388.71 h100
  text "160x80" at 1380.97,-388.69 h50
  text "3V3" at 13.42,-451.9 h65
  text "3V3" at 113.42,-451.9 h65
  text "RST" at 214.17,-451.92 h65
  text "4" at 338.05,-451.92 h65
  text "5" at 439.51,-451.92 h65
  text "6" at 539.4,-451.92 h65
  text "7" at 639.18,-451.92 h65
  text "15" at 732.3,-451.92 h65
  text "16" at 832.14,-451.92 h65
  text "17" at 932.41,-451.92 h65
  text "18" at 1031.91,-451.92 h65
  text "8" at 1139.13,-451.92 h65
  text "3" at 1239.38,-451.92 h65
  text "46" at 1325.53,-451.92 h65
  text "9" at 1439.38,-451.92 h65
  text "10" at 1532.01,-451.92 h65
  text "11" at 1638.79,-451.92 h65
  text "12" at 1732.46,-451.92 h65
  text "13" at 1832.12,-451.92 h65
  text "14" at 1931.6,-451.92 h65
  text "5V" at 2026.07,-451.9 h65
  text "GND" at 2111.87,-451.92 h65
Bottom Overlay:
  text "GND" at 11.87,451.92 h65 r180
  text "TX" at 126.95,451.92 h65 r180
  text "RX" at 225.87,451.92 h65 r180
  text "1" at 345.53,451.92 h65 r180
  text "2" at 439.36,451.92 h65 r180
  text "42" at 525.85,451.92 h65 r180
  text "41" at 632.19,451.92 h65 r180
  text "40" at 725.4,451.92 h65 r180
  text "39" at 826.25,451.92 h65 r180
  text "38" at 925.98,451.92 h65 r180
  text "37" at 1026.48,451.92 h65 r180
  text "36" at 1126.21,451.92 h65 r180
  text "35" at 1226.37,451.92 h65 r180
  text "0" at 1339.27,451.92 h65 r180
  text "45" at 1425.69,451.92 h65 r180
  text "48" at 1525.31,451.92 h65 r180
  text "47" at 1625.8,451.92 h65 r180
  text "21" at 1733.04,451.92 h65 r180
  text "20" at 1826.25,451.92 h65 r180
  text "19" at 1932.19,451.92 h65 r180
  text "GND" at 2011.87,451.92 h65 r180
  text "GND" at 2111.87,451.92 h65 r180
  text "COM" at 2449.14,320.5 h100 r90
  text "T" at 1632.79,253.93 h80 r90
  text "R" at 1632.79,153.93 h80 r90
  text "P" at 1632.83,62.98 h80 r90
  text "USB" at 2449.14,-139.5 h100 r90
  text "3V3" at 86.58,-451.9 h65
  text "3V3" at 186.58,-451.9 h65
  text "RST" at 285.83,-451.92 h65
  text "4" at 361.95,-451.92 h65
  text "5" at 460.49,-451.92 h65
  text "6" at 560.6,-451.92 h65
  text "7" at 660.82,-451.92 h65
  text "15" at 767.7,-451.92 h65
  text "16" at 867.86,-451.92 h65
  text "17" at 967.59,-451.92 h65
  text "18" at 1068.09,-451.92 h65
  text "8" at 1160.87,-451.92 h65
  text "3" at 1260.62,-451.92 h65
  text "46" at 1374.47,-451.92 h65
  text "9" at 1460.62,-451.92 h65
  text "10" at 1567.99,-451.92 h65
  text "11" at 1661.21,-451.92 h65
  text "12" at 1767.54,-451.92 h65
  text "13" at 1867.88,-451.92 h65
  text "14" at 1968.4,-451.92 h65
  text "5V" at 2073.93,-451.9 h65
  text "GND" at 2188.13,-451.92 h65
Mechanical 1:
  the board outline again, w10